# EAGLE board RelayBoard (EAGLE 6.1)
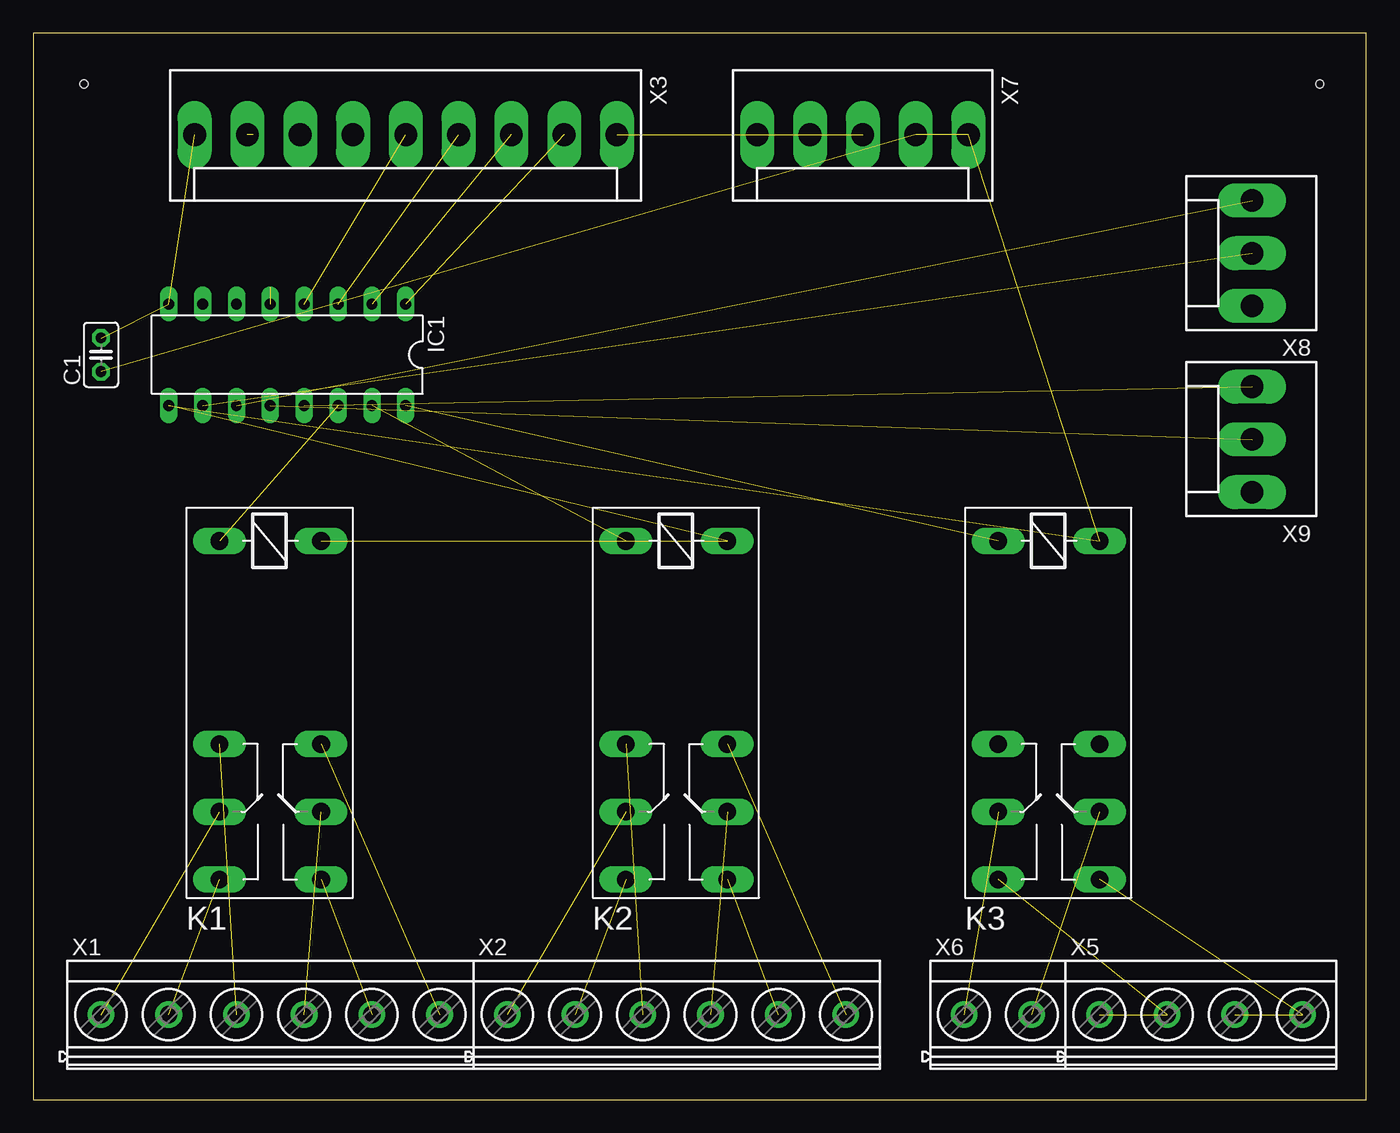
[diagram p0: board, top side]
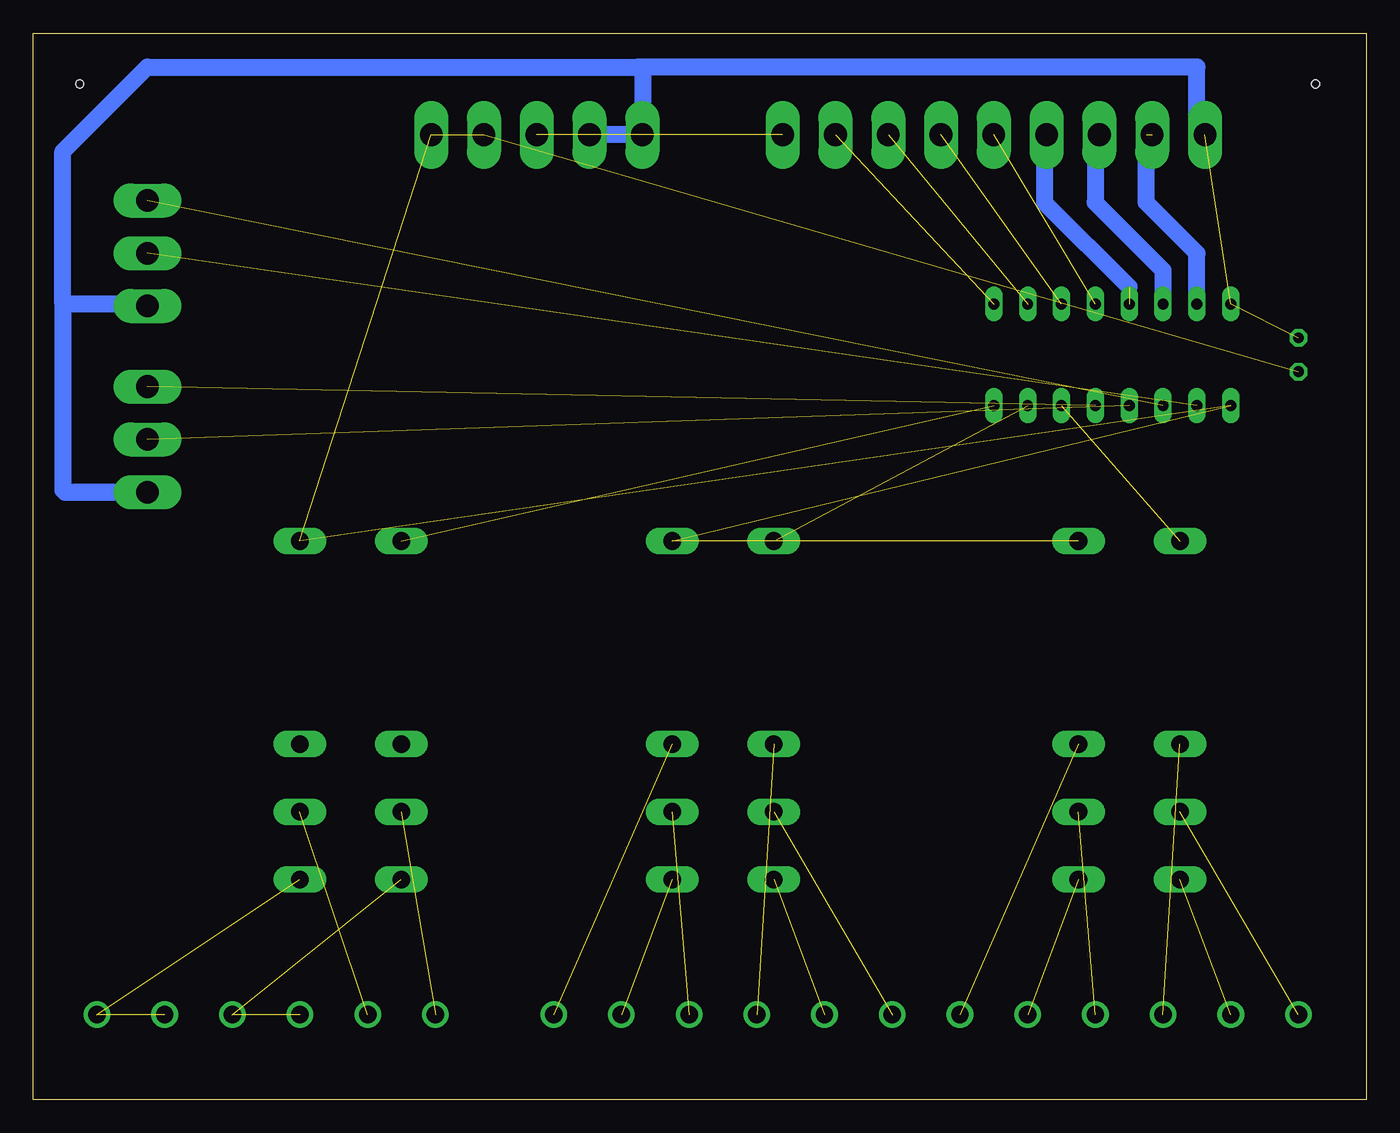
[diagram p1: board, bottom side, seen from below]

Size 100 x 80 mm. Coordinates in mm from the lower left corner, seen from the top.
Outline: 0,0 100,0 100,80 0,80 0,0
Copper layers (1*16): Top 0.035mm / dielectric 1.5mm / Bottom 0.035mm
Design rules: minimum track width 10mil, minimum drill 24mil, track to track 8mil, track to pad 8mil, pad to pad 8mil, via to via 8mil, smd to smd 8mil, copper to edge 40mil, drill to drill 8mil, minimum pad ring 10mil, minimum via ring 8mil, stop-mask expansion 4mil, vias tented up to drill 0mil, thermal gap 10mil
Holes 0.6 mm at 3.81,76.2 96.52,76.2

## Footprints (pad centres in the part's own frame; a part is rotated, then mirrored left to right if it is on the bottom)
C025-025X050 = drill 0.813 octagon: 1 -1.27,0; 2 1.27,0
DIL16 = drill 0.813 long: 1 -8.89,-3.81; 2 -6.35,-3.81; 3 -3.81,-3.81; 4 -1.27,-3.81; 5 1.27,-3.81; 6 3.81,-3.81; 7 6.35,-3.81; 8 8.89,-3.81; 9 8.89,3.81; 10 6.35,3.81; 11 3.81,3.81; 12 1.27,3.81; 13 -1.27,3.81; 14 -3.81,3.81; 15 -6.35,3.81; 16 -8.89,3.81
F4052 = drill 1.321 long: 1 -3.81,3.81; 2 -3.81,-3.81; O1 11.43,-3.81; O2 11.43,3.81; P1 16.51,-3.81; P2 16.51,3.81; S1 21.59,-3.81; S2 21.59,3.81
MKDSN1,5/6-5,08 = drill 1.3 pad 2: 1 -12.7,0.025; 2 -7.62,0.025; 3 -2.54,0.025; 4 2.54,0.025; 5 7.62,0.025; 6 12.7,0.025
KK-156-9 = drill 1.7 pad 2.184 long: 1 -15.84,0; 2 -11.88,0; 3 -7.92,0; 4 -3.96,0; 5 0,0; 6 3.96,0; 7 7.92,0; 8 11.88,0; 9 15.84,0
MKDSN1,5/4-5,08 = drill 1.3 pad 2: 1 -7.641,0.025; 2 -2.561,0.025; 3 2.519,0.025; 4 7.599,0.025
MKDSN1,5/2-5,08 = drill 1.3 pad 2: 1 -2.561,0.025; 2 2.519,0.025
KK-156-5 = drill 1.7 pad 2.184 long: 1 -7.92,0; 2 -3.96,0; 3 0,0; 4 3.96,0; 5 7.92,0
KK-156-3 = drill 1.7 pad 2.184 long: 1 -3.96,0; 2 0,0; 3 3.96,0

## Placement (x,y rotation side)
C1  100nF  [C025-025X050]  5.08,55.88 90 top
IC1  ULN2003AN  [DIL16]  19.05,55.88 180 top
K1  4052  [F4052]  17.78,38.1 270 top
K2  4052  [F4052]  48.26,38.1 270 top
K3  4052  [F4052]  76.2,38.1 270 top
X1  MKDSN1,5/6-5,08  [MKDSN1,5/6-5,08]  17.78,6.35 0 top
X2  MKDSN1,5/6-5,08  [MKDSN1,5/6-5,08]  48.26,6.35 0 top
X3  Con1  [KK-156-9]  27.94,72.39 180 top
X5  MKDSN1,5/4-5,08  [MKDSN1,5/4-5,08]  87.63,6.35 0 top
X6  MKDSN1,5/2-5,08  [MKDSN1,5/2-5,08]  72.39,6.35 0 top
X7  Con2  [KK-156-5]  62.23,72.39 180 top
X8  [KK-156-3]  91.44,63.5 90 top
X9  [KK-156-3]  91.44,49.53 90 top

## Library data of the parts
C1 = resistor
IC1 = uln-udn
K1-K3 = relay; OC_FARNELL: unknown; OC_NEWARK: unknown
X1 X2 = con-phoenix-508; MPN: SMKDSN1,5/6-5,08; OC_FARNELL: 1792907; OC_NEWARK: 70R0302
X3 X7-X9 = con-molex; OC_FARNELL: unknown; OC_NEWARK: unknown
X5 = con-phoenix-508; MPN: SMKDSN1,5/4-5,08; OC_FARNELL: 1792905; OC_NEWARK: 70R0300
X6 = con-phoenix-508; MPN: MKDSN 1,5/2-5.08; OC_FARNELL: 1792903; OC_NEWARK: 30M2397

## Nets
0V: C1.2 IC1.8 X3.9 X7.4 X7.5 X8.1 X9.1
+5V: X3.1 X7.3
+12V: C1.1 IC1.9 K1.1 K2.1 K3.1 X7.1 X7.2
N$1: K3.P1 X6.1
N$2: K3.P2 X6.2
N$3: K3.S1 X5.1 X5.2
N$4: IC1.16 K3.2
N$5: K3.S2 X5.3 X5.4
N$6: K2.P1 X2.1
N$7: K2.S1 X2.2
N$8: K2.O1 X2.3
N$9: K2.P2 X2.4
N$10: K2.S2 X2.5
N$11: K2.O2 X2.6
N$12: K1.P1 X1.1
N$13: K1.S1 X1.2
N$14: K1.O1 X1.3
N$15: K1.P2 X1.4
N$16: K1.S2 X1.5
N$17: K1.O2 X1.6
N$18: IC1.1 X3.2
N$19: IC1.2 X3.3
N$20: IC1.3 X3.4
N$21: IC1.4 X3.5
N$22: IC1.5 X3.6
N$23: IC1.6 X3.7
N$24: IC1.7 X3.8
N$25: IC1.15 K2.2
N$26: IC1.14 K1.2
N$27: IC1.11 X8.3
N$28: IC1.10 X8.2
N$29: IC1.13 X9.3
N$30: IC1.12 X9.2

## Tracks (layer width: path | path; a pad name or v marks a point on that pad's centre or on a via)
0V  (2 unrouted)
  Bottom 1.27: X3.9 12.7,72.99 12.7,77.47 53.34,77.47 54.61,77.47 | 54.61,77.47 54.31,77.17 X7.5 X7.4 | 97.79,59.69 97.79,45.72 97.64,45.57 X9.1 | X8.1 91.59,59.69 97.79,59.69 | 97.79,59.69 97.79,71.12 91.44,77.47 54.61,77.47
+5V  (1 unrouted)
+12V  (6 unrouted)
N$1  (1 unrouted)
N$2  (1 unrouted)
N$3  (2 unrouted)
N$4  (1 unrouted)
N$5  (2 unrouted)
N$6  (1 unrouted)
N$7  (1 unrouted)
N$8  (1 unrouted)
N$9  (1 unrouted)
N$10  (1 unrouted)
N$11  (1 unrouted)
N$12  (1 unrouted)
N$13  (1 unrouted)
N$14  (1 unrouted)
N$15  (1 unrouted)
N$16  (1 unrouted)
N$17  (1 unrouted)
N$18  (1 unrouted)
N$19  (1 unrouted)
N$20  (1 unrouted)
N$21  (1 unrouted)
N$22  (1 unrouted)
  Bottom 1.27: X3.6 24.13,72.24 24.13,67.31 17.78,60.96
N$23
  Bottom 1.27: X3.7 20.32,72.09 20.32,67.31 15.24,62.23 IC1.6
N$24  (1 unrouted)
  Bottom 1.27: IC1.7 12.7,63.5 16.51,67.31 16.51,72.39
N$25  (1 unrouted)
N$26  (1 unrouted)
N$27  (1 unrouted)
N$28  (1 unrouted)
N$29  (1 unrouted)
N$30  (1 unrouted)